# EAGLE board gatemodified (EAGLE 6.1)
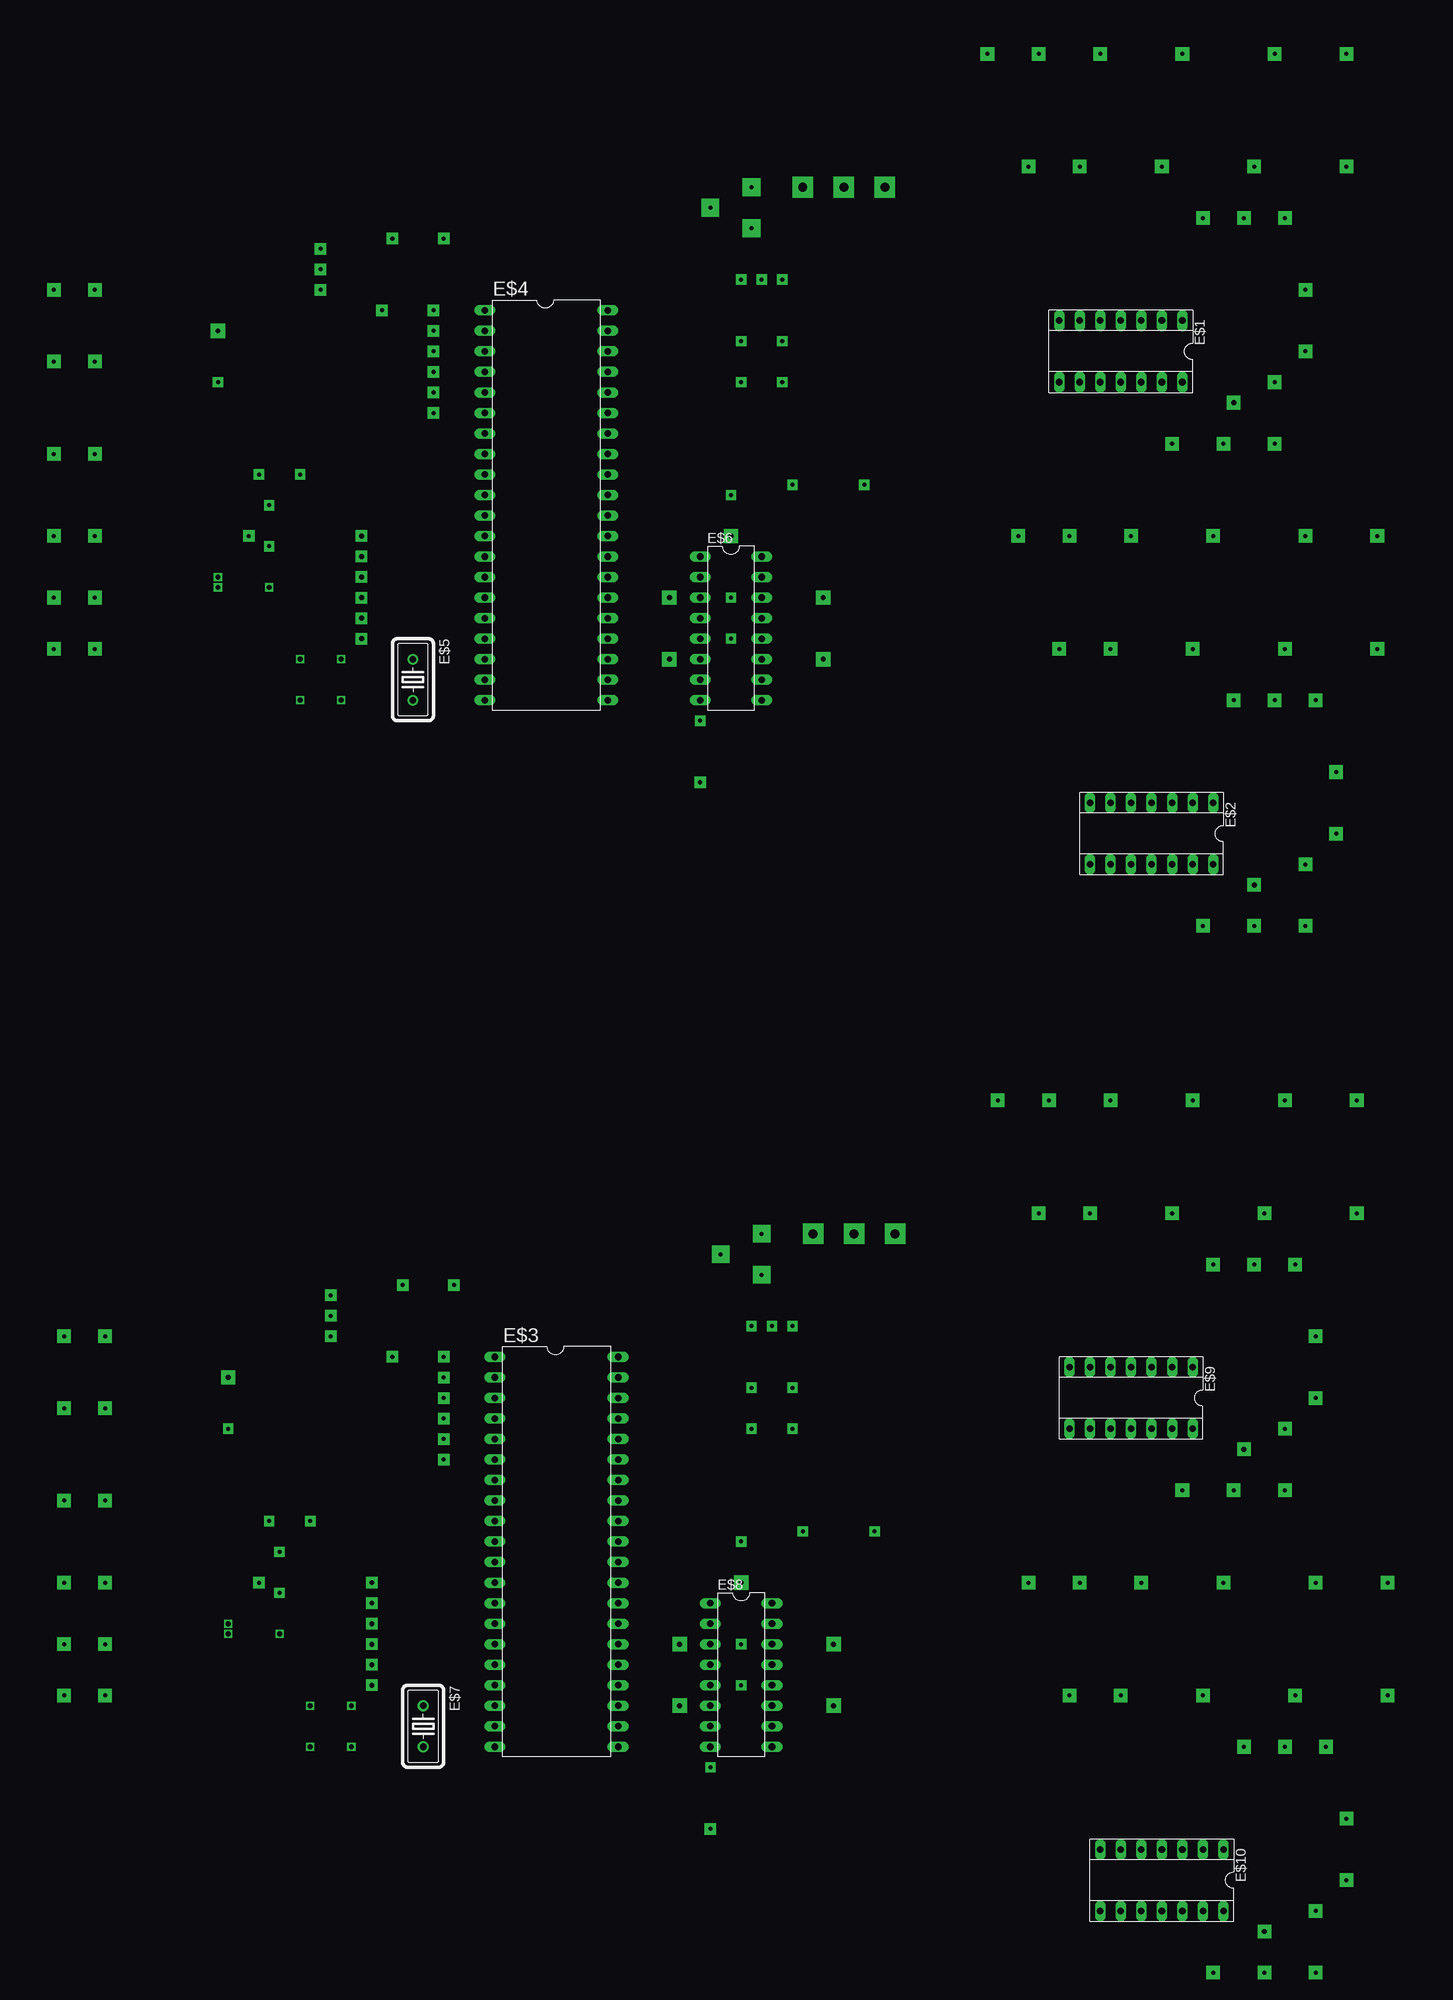
[diagram p0: board, top side]
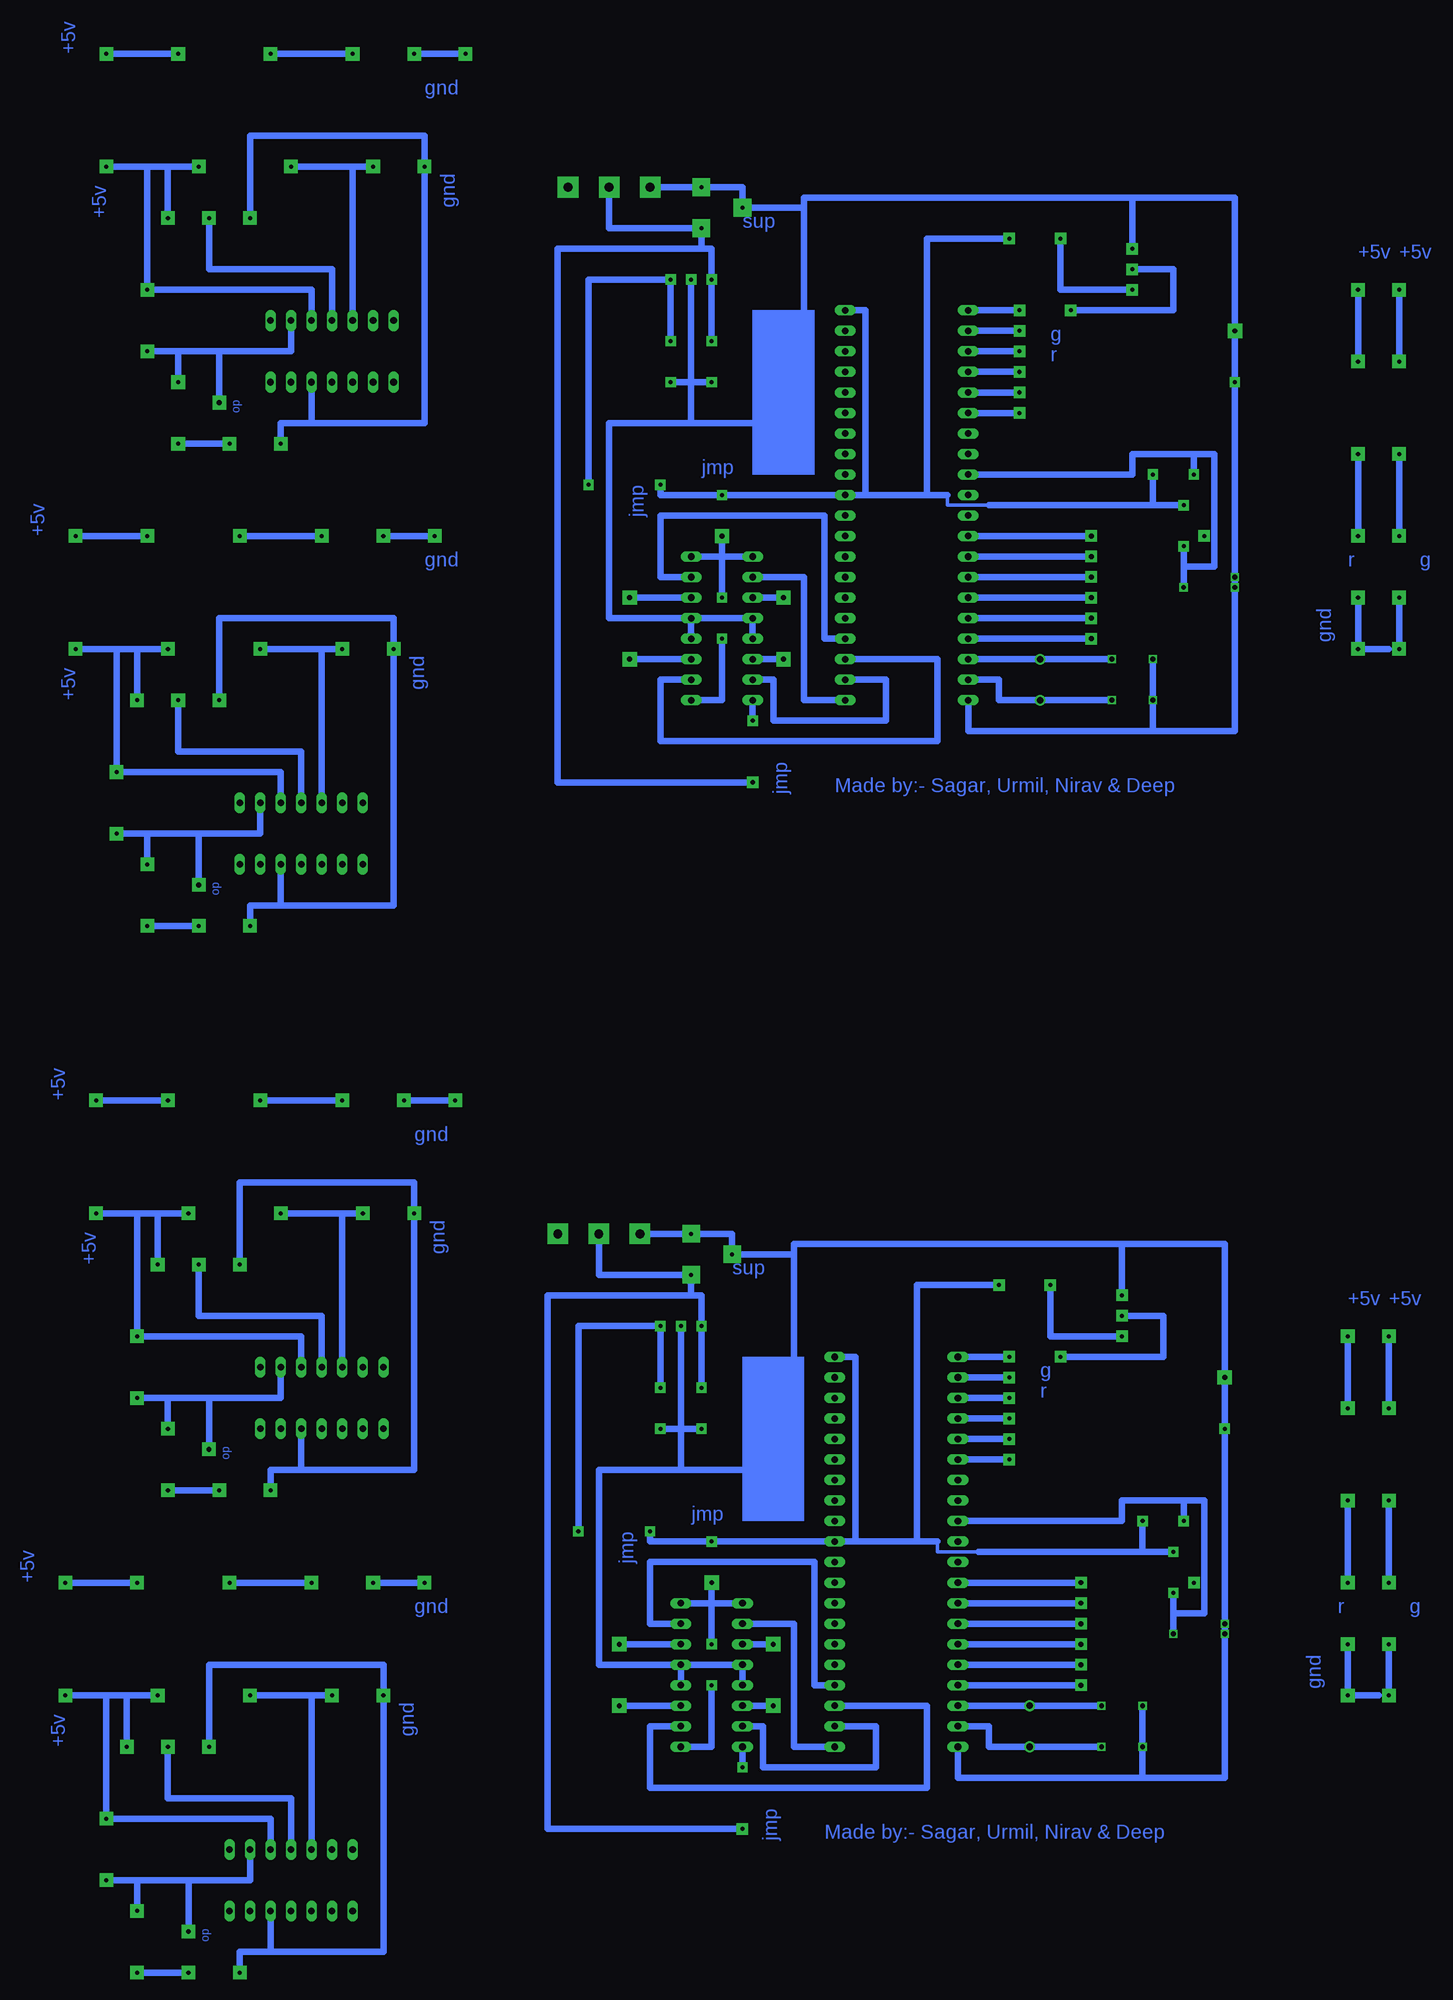
[diagram p1: board, bottom side, seen from below]

No outline drawn. Coordinates in mm, seen from the top.
Copper layers (1*16): Top 0.035mm / dielectric 1.5mm / Bottom 0.035mm
Design rules: minimum track width 10mil, minimum drill 24mil, track to track 8mil, track to pad 8mil, pad to pad 8mil, via to via 8mil, smd to smd 8mil, copper to edge 40mil, drill to drill 8mil, minimum pad ring 10mil, minimum via ring 8mil, stop-mask expansion 4mil, vias tented up to drill 0mil, thermal gap 10mil

## Footprints (pad centres in the part's own frame; a part is rotated, then mirrored left to right if it is on the bottom)
SOCKET-14 = drill 0.813 long: 1 -7.62,-3.81; 2 -5.08,-3.81; 3 -2.54,-3.81; 4 0,-3.81; 5 2.54,-3.81; 6 5.08,-3.81; 7 7.62,-3.81; 8 7.62,3.81; 9 5.08,3.81; 10 2.54,3.81; 11 0,3.81; 12 -2.54,3.81; 13 -5.08,3.81; 14 -7.62,3.81
DIL40 = drill 0.813 long: 1 -24.13,-7.62; 2 -21.59,-7.62; 3 -19.05,-7.62; 4 -16.51,-7.62; 5 -13.97,-7.62; 6 -11.43,-7.62; 7 -8.89,-7.62; 8 -6.35,-7.62; 9 -3.81,-7.62; 10 -1.27,-7.62; 11 1.27,-7.62; 12 3.81,-7.62; 13 6.35,-7.62; 14 8.89,-7.62; 15 11.43,-7.62; 16 13.97,-7.62; 17 16.51,-7.62; 18 19.05,-7.62; 19 21.59,-7.62; 20 24.13,-7.62; 21 24.13,7.62; 22 21.59,7.62; 23 19.05,7.62; 24 16.51,7.62; 25 13.97,7.62; 26 11.43,7.62; 27 8.89,7.62; 28 6.35,7.62; 29 3.81,7.62; 30 1.27,7.62; 31 -1.27,7.62; 32 -3.81,7.62; 33 -6.35,7.62; 34 -8.89,7.62; 35 -11.43,7.62; 36 -13.97,7.62; 37 -16.51,7.62; 38 -19.05,7.62; 39 -21.59,7.62; 40 -24.13,7.62
HC18U-V = drill 0.813: 1 -2.54,0; 2 2.54,0
DIL16 = drill 0.813 long: 1 -8.89,-3.81; 2 -6.35,-3.81; 3 -3.81,-3.81; 4 -1.27,-3.81; 5 1.27,-3.81; 6 3.81,-3.81; 7 6.35,-3.81; 8 8.89,-3.81; 9 8.89,3.81; 10 6.35,3.81; 11 3.81,3.81; 12 1.27,3.81; 13 -1.27,3.81; 14 -3.81,3.81; 15 -6.35,3.81; 16 -8.89,3.81

## Placement (x,y rotation side)
E$1  [SOCKET-14]  99.06,68.58 180 top
E$2  [SOCKET-14]  102.87,8.89 180 top
E$3  [DIL40]  29.21,-80.01 270 top
E$4  [DIL40]  27.94,49.53 270 top
E$5  [HC18U-V]  11.43,27.94 270 top
E$6  [DIL16]  50.8,34.29 270 top
E$7  [HC18U-V]  12.7,-101.6 270 top
E$8  [DIL16]  52.07,-95.25 270 top
E$9  [SOCKET-14]  100.33,-60.96 180 top
E$10  [SOCKET-14]  104.14,-120.65 180 top

## Library data of the parts
E$1 E$2 E$9 E$10 = ic-package
E$3 E$4 E$6 E$8 = 40xx
E$5 E$7 = crystal

## Nets
S$1: E$4.2
S$2: E$4.20
S$5: E$4.5
S$7: E$4.1
S$8: E$4.3
S$9: E$4.31 E$4.40
S$10: E$4.4
S$12: E$4.6
S$17: E$1.5
S$18: E$1.4
S$19: E$1.12
S$21: E$1.3
S$25: E$2.5
S$26: E$2.4
S$27: E$2.12
S$29: E$2.3
S$30: E$1.2
S$31: E$2.2
S$37: E$8.3
S$39: E$8.6
S$40: E$8.14
S$41: E$8.11
S$42: E$3.22 E$8.7
S$43: E$3.21 E$8.2
S$44: E$3.23 E$8.10
S$45: E$8.1 E$8.16
S$46: E$3.24 E$8.15
S$47: E$8.9
S$48: E$3.9
S$49: E$3.19 E$7.2
S$50: E$3.17
S$51: E$3.16
S$52: E$3.15
S$53: E$6.3
S$54: E$6.6
S$55: E$3.14
S$56: E$6.14
S$57: E$6.11
S$58: E$4.22 E$6.7
S$59: E$4.21 E$6.2
S$60: E$3.13
S$61: E$4.23 E$6.10
S$62: E$6.1 E$6.16
S$63: E$3.12
S$64: E$4.24 E$6.15
S$65: E$3.18 E$7.1
S$68: E$8.4 E$8.5 E$8.12 E$8.13
S$69: E$6.9
S$71: E$8.8
S$74: E$4.9
S$75: E$4.19 E$5.2
S$76: E$4.17
S$77: E$4.16
S$78: E$4.15
S$79: E$4.14
S$80: E$4.13
S$81: E$4.12
S$82: E$4.18 E$5.1
S$85: E$3.20
S$87: E$3.1
S$88: E$3.31 E$3.40
S$89: E$3.2
S$90: E$3.3
S$91: E$3.4
S$93: E$3.5
S$94: E$3.6
S$96: E$6.4 E$6.5 E$6.12 E$6.13
S$99: E$6.8
S$102: E$9.5
S$103: E$9.4
S$104: E$9.12
S$106: E$9.3
S$110: E$10.5
S$111: E$10.4
S$112: E$10.12
S$114: E$10.3
S$115: E$9.2
S$116: E$10.2

## Tracks (layer width: path | path; a pad name or v marks a point on that pad's centre or on a via)
S$1  (via drill 0.5 pad 1.42)
  Bottom 0.813: E$4.2 v13.97,71.12
S$2  (via drill 0.5 pad 1.27, 0.5 pad 1.42, 0.5 pad 2.18, 0.6, 0.6 pad 1.78, 1.1 pad 2.54)
  Bottom 0.813: 0,87.63 -12.7,87.63 v-12.7,71.12 v-12.7,64.77 v-12.7,39.37 -12.7,21.59 -2.54,21.59 | 0,87.63 40.64,87.63 40.64,86.36 | 40.64,86.36 40.64,71.12 44.45,71.12 44.45,59.69 | -2.54,21.59 20.32,21.59 E$4.20 | v-2.54,30.48 -2.54,21.59 | 40.64,86.36 v48.26,86.36 48.26,88.9 v53.34,88.9 v59.69,88.9 54.61,88.9 | v0,81.28 0,87.63
S$4  (via drill 0.5 pad 2.18, 1.1 pad 2.54)
  Bottom 0.813: 54.61,-48.26 v54.61,-45.72 66.04,-45.72 v66.04,-40.64
S$5  (via drill 0.5 pad 1.42)
  Bottom 0.813: E$4.5 v13.97,63.5
S$6  (via drill 0.5 pad 1.42)
  Bottom 0.813: v0,76.2 8.89,76.2 v8.89,82.55
S$7  (via drill 0.5 pad 1.42)
  Bottom 0.813: v13.97,73.66 E$4.1
S$8  (via drill 0.5 pad 1.42)
  Bottom 0.813: E$4.3 v13.97,68.58
S$9  (via drill 0.5 pad 1.27, 0.5 pad 1.42)
  Bottom 0.406: 22.86,50.8 22.86,49.53 17.78,49.53
  Bottom 0.813: E$4.40 33.02,73.66 33.02,50.8 | 33.02,50.8 E$4.31 v50.8,50.8 58.42,50.8 v58.42,52.07 | v-2.54,53.34 -2.54,49.53 | v-6.35,49.53 -2.54,49.53 | 33.02,50.8 25.4,50.8 | 25.4,50.8 22.86,50.8 | v15.24,82.55 25.4,82.55 25.4,50.8 | -2.54,49.53 17.78,49.53
S$10  (via drill 0.5 pad 1.42)
  Bottom 0.813: E$4.4 v13.97,66.04
S$11  (via drill 0.5 pad 1.42)
  Bottom 0.813: v7.62,73.66 -5.08,73.66 -5.08,78.74 v0,78.74
S$12  (via drill 0.5 pad 1.42)
  Bottom 0.813: E$4.6 v13.97,60.96
S$13  (via drill 0.5 pad 1.42)
  other vias: -8.89,45.72
S$14  (via drill 0.5 pad 1.68)
  Bottom 0.813: v127,105.41 v118.11,105.41
S$15  (via drill 0.5 pad 1.68)
  Bottom 0.813: v106.68,105.41 v96.52,105.41
S$16  (via drill 0.5 pad 1.68)
  Bottom 0.813: v88.9,105.41 v82.55,105.41
S$17  (via drill 0.5 pad 1.68)
  Bottom 0.813: v104.14,91.44 96.52,91.44 | 96.52,91.44 v93.98,91.44 | E$1.5 96.52,91.44
S$18  (via drill 0.5 pad 1.68)
  Bottom 0.813: v114.3,85.09 114.3,78.74 99.06,78.74 E$1.4
S$19  (via drill 0.5 pad 1.68)
  Bottom 0.813: E$1.12 101.6,59.69 | 101.6,59.69 87.63,59.69 v87.63,91.44 87.63,95.25 109.22,95.25 v109.22,85.09 | 101.6,59.69 105.41,59.69 v105.41,57.15
S$20  (via drill 0.5 pad 1.68)
  Bottom 0.813: v118.11,57.15 v111.76,57.15
S$21  (via drill 0.5 pad 1.68)
  Bottom 0.813: v127,91.44 121.92,91.44 | 121.92,91.44 119.38,91.44 | v119.38,85.09 119.38,91.44 | 119.38,91.44 v115.57,91.44 | E$1.3 101.6,76.2 v121.92,76.2 121.92,91.44
S$22  (via drill 0.5 pad 1.68)
  Bottom 0.813: v130.81,45.72 v121.92,45.72
S$23  (via drill 0.5 pad 1.68)
  Bottom 0.813: v110.49,45.72 v100.33,45.72
S$24  (via drill 0.5 pad 1.68)
  Bottom 0.813: v92.71,45.72 v86.36,45.72
S$25  (via drill 0.5 pad 1.68)
  Bottom 0.813: v107.95,31.75 100.33,31.75 | 100.33,31.75 v97.79,31.75 | E$2.5 100.33,31.75
S$26  (via drill 0.5 pad 1.68)
  Bottom 0.813: v118.11,25.4 118.11,19.05 102.87,19.05 E$2.4
S$27  (via drill 0.5 pad 1.68)
  Bottom 0.813: E$2.12 105.41,0 | 105.41,0 91.44,0 v91.44,31.75 91.44,35.56 113.03,35.56 v113.03,25.4 | 105.41,0 109.22,0 v109.22,-2.54
S$28  (via drill 0.5 pad 1.68)
  Bottom 0.813: v121.92,-2.54 v115.57,-2.54
S$29  (via drill 0.5 pad 1.68)
  Bottom 0.813: v130.81,31.75 125.73,31.75 | 125.73,31.75 123.19,31.75 | v123.19,25.4 123.19,31.75 | 123.19,31.75 v119.38,31.75 | E$2.3 105.41,16.51 v125.73,16.51 125.73,31.75
S$30  (via drill 0.5 pad 1.68, 0.6 pad 1.68)
  Bottom 0.813: E$1.2 104.14,68.58 113.03,68.58 | 113.03,68.58 118.11,68.58 | 118.11,68.58 v118.11,64.77 | 118.11,68.58 v121.92,68.58 | v113.03,62.23 113.03,68.58
S$31  (via drill 0.5 pad 1.68, 0.6 pad 1.68)
  Bottom 0.813: E$2.2 107.95,8.89 115.57,8.89 | 115.57,8.89 121.92,8.89 | 121.92,8.89 v121.92,5.08 | 121.92,8.89 v125.73,8.89 | v115.57,2.54 115.57,8.89
S$32  (via drill 0.5 pad 1.68)
  Bottom 0.813: v-33.02,76.2 v-33.02,67.31
S$33  (via drill 0.5 pad 1.68)
  Bottom 0.813: v-27.94,55.88 v-27.94,45.72
S$34  (via drill 0.5 pad 1.68)
  Bottom 0.813: v-33.02,38.1 v-33.02,31.75
S$35  (via drill 0.5 pad 1.68)
  Bottom 0.813: v-27.94,76.2 v-27.94,67.31
S$36  (via drill 0.5 pad 1.68)
  Bottom 0.813: v-33.02,55.88 v-33.02,45.72
S$37  (via drill 0.6 pad 1.78)
  Bottom 0.813: E$8.3 v44.45,-91.44
S$38  (via drill 0.5 pad 1.68)
  Bottom 0.813: -31.75,31.75 v-27.94,31.75 v-27.94,38.1
S$39  (via drill 0.6 pad 1.78)
  Bottom 0.813: E$8.6 v44.45,-99.06
S$40  (via drill 0.6 pad 1.78)
  Bottom 0.813: E$8.14 v63.5,-91.44
S$41  (via drill 0.6 pad 1.78)
  Bottom 0.813: E$8.11 v63.5,-99.06
S$42
  Bottom 0.813: E$8.7 45.72,-101.6 45.72,-106.68 31.75,-106.68 31.75,-101.6 E$3.22
S$43
  Bottom 0.813: E$8.2 41.91,-88.9 41.91,-104.14 E$3.21
S$44
  Bottom 0.813: E$3.23 25.4,-99.06 25.4,-109.22 59.69,-109.22 59.69,-101.6 E$8.10
S$45  (via drill 0.5 pad 1.27, 0.6 pad 1.78)
  Bottom 0.813: E$8.1 52.07,-86.36 | 52.07,-86.36 E$8.16 | 52.07,-86.36 v52.07,-83.82 | v52.07,-91.44 52.07,-86.36
S$46
  Bottom 0.813: E$3.24 39.37,-96.52 39.37,-81.28 59.69,-81.28 59.69,-88.9 E$8.15
S$47  (via drill 0.5 pad 0.81, 0.5 pad 1.27)
  Bottom 0.813: E$8.9 52.07,-104.14 v52.07,-96.52
S$48  (via drill 0.5 pad 1.27, 0.6)
  Bottom 0.813: v-5.08,-85.09 -5.08,-87.63 | v-6.35,-76.2 -6.35,-73.66 | -6.35,-73.66 1.27,-73.66 1.27,-76.2 E$3.9 | -6.35,-73.66 -8.89,-73.66 -8.89,-87.63 -5.08,-87.63 | -5.08,-87.63 v-5.08,-90.17
S$49  (via drill 0.6)
  Bottom 0.813: E$3.19 17.78,-101.6 17.78,-104.14 E$7.2 v3.81,-104.14
S$50  (via drill 0.5 pad 1.42, 0.6)
  Bottom 0.813: E$3.17 v6.35,-96.52
S$51  (via drill 0.5 pad 1.42, 0.6)
  Bottom 0.813: E$3.16 v6.35,-93.98
S$52  (via drill 0.5 pad 1.42, 0.6)
  Bottom 0.813: E$3.15 v6.35,-91.44
S$53  (via drill 0.6 pad 1.78)
  Bottom 0.813: E$6.3 v43.18,38.1
S$54  (via drill 0.6 pad 1.78)
  Bottom 0.813: E$6.6 v43.18,30.48
S$55  (via drill 0.5 pad 1.42, 0.6)
  Bottom 0.813: E$3.14 v6.35,-88.9
S$56  (via drill 0.6 pad 1.78)
  Bottom 0.813: E$6.14 v62.23,38.1
S$57  (via drill 0.6 pad 1.78)
  Bottom 0.813: E$6.11 v62.23,30.48
S$58
  Bottom 0.813: E$6.7 44.45,27.94 44.45,22.86 30.48,22.86 30.48,27.94 E$4.22
S$59
  Bottom 0.813: E$6.2 40.64,40.64 40.64,25.4 E$4.21
S$60  (via drill 0.5 pad 1.42, 0.6)
  Bottom 0.813: E$3.13 v6.35,-86.36
S$61
  Bottom 0.813: E$4.23 24.13,30.48 24.13,20.32 58.42,20.32 58.42,27.94 E$6.10
S$62  (via drill 0.5 pad 1.27, 0.6 pad 1.78)
  Bottom 0.813: E$6.1 50.8,43.18 | 50.8,43.18 E$6.16 | 50.8,43.18 v50.8,45.72 | v50.8,38.1 50.8,43.18
S$63  (via drill 0.5 pad 1.42, 0.6)
  Bottom 0.813: E$3.12 v6.35,-83.82
S$64
  Bottom 0.813: E$4.24 38.1,33.02 38.1,48.26 58.42,48.26 58.42,40.64 E$6.15
S$65  (via drill 0.6)
  Bottom 0.813: E$3.18 E$7.1 v3.81,-99.06
S$66  (via drill 0.6)
  other vias: -11.43,-88.9
S$67  (via drill 0.6)
  other vias: -1.27,-104.14
S$68  (via drill 0.5 pad 1.27)
  Bottom 0.813: E$8.13 E$8.12 | E$8.13 E$8.4 E$8.5 | v55.88,-52.07 55.88,-64.77 | v58.42,-64.77 55.88,-64.77 | 55.88,-64.77 v53.34,-64.77 | 55.88,-69.85 66.04,-69.85 66.04,-93.98 E$8.13 | 55.88,-69.85 46.99,-69.85 | 55.88,-64.77 55.88,-69.85
S$69  (via drill 0.5 pad 0.81, 0.5 pad 1.27)
  Bottom 0.813: E$6.9 50.8,25.4 v50.8,33.02
S$70  (via drill 0.5 pad 1.27)
  Bottom 0.813: v58.42,-59.69 v58.42,-52.07 68.58,-52.07 v68.58,-77.47
S$71  (via drill 0.5 pad 1.27)
  Bottom 0.813: E$8.8 v48.26,-106.68
S$73  (via drill 0.5 pad 1.27, 0.5 pad 1.42)
  Bottom 0.813: v48.26,-114.3 72.39,-114.3 72.39,-48.26 53.34,-48.26 v53.34,-52.07 v53.34,-59.69
S$74  (via drill 0.5 pad 1.27, 0.6)
  Bottom 0.813: v-6.35,44.45 -6.35,41.91 | v-7.62,53.34 -7.62,55.88 | -7.62,55.88 0,55.88 0,53.34 E$4.9 | -7.62,55.88 -10.16,55.88 -10.16,41.91 -6.35,41.91 | -6.35,41.91 v-6.35,39.37
S$75  (via drill 0.6)
  Bottom 0.813: E$4.19 16.51,27.94 16.51,25.4 E$5.2 v2.54,25.4
S$76  (via drill 0.5 pad 1.42, 0.6)
  Bottom 0.813: E$4.17 v5.08,33.02
S$77  (via drill 0.5 pad 1.42, 0.6)
  Bottom 0.813: E$4.16 v5.08,35.56
S$78  (via drill 0.5 pad 1.42, 0.6)
  Bottom 0.813: E$4.15 v5.08,38.1
S$79  (via drill 0.5 pad 1.42, 0.6)
  Bottom 0.813: E$4.14 v5.08,40.64
S$80  (via drill 0.5 pad 1.42, 0.6)
  Bottom 0.813: E$4.13 v5.08,43.18
S$81  (via drill 0.5 pad 1.42, 0.6)
  Bottom 0.813: E$4.12 v5.08,45.72
S$82  (via drill 0.6)
  Bottom 0.813: E$4.18 E$5.1 v2.54,30.48
S$83  (via drill 0.6)
  other vias: -12.7,40.64
S$84  (via drill 0.6)
  other vias: -2.54,25.4
S$85  (via drill 0.5 pad 1.27, 0.5 pad 1.42, 0.5 pad 2.18, 0.6, 0.6 pad 1.78, 1.1 pad 2.54)
  Bottom 0.813: 1.27,-41.91 -11.43,-41.91 v-11.43,-58.42 v-11.43,-64.77 v-11.43,-90.17 -11.43,-107.95 -1.27,-107.95 | 1.27,-41.91 41.91,-41.91 41.91,-43.18 | 41.91,-43.18 41.91,-58.42 45.72,-58.42 45.72,-69.85 | -1.27,-107.95 21.59,-107.95 E$3.20 | v-1.27,-99.06 -1.27,-107.95 | 41.91,-43.18 v49.53,-43.18 49.53,-40.64 v54.61,-40.64 v60.96,-40.64 55.88,-40.64 | v1.27,-48.26 1.27,-41.91
S$86  (via drill 0.5 pad 1.42)
  Bottom 0.813: v1.27,-53.34 10.16,-53.34 v10.16,-46.99
S$87  (via drill 0.5 pad 1.42)
  Bottom 0.813: v15.24,-55.88 E$3.1
S$88  (via drill 0.5 pad 1.27, 0.5 pad 1.42)
  Bottom 0.406: 24.13,-78.74 24.13,-80.01 19.05,-80.01
  Bottom 0.813: E$3.40 34.29,-55.88 34.29,-78.74 | 34.29,-78.74 E$3.31 v52.07,-78.74 59.69,-78.74 v59.69,-77.47 | v-1.27,-76.2 -1.27,-80.01 | v-5.08,-80.01 -1.27,-80.01 | 34.29,-78.74 26.67,-78.74 | 26.67,-78.74 24.13,-78.74 | v16.51,-46.99 26.67,-46.99 26.67,-78.74 | -1.27,-80.01 19.05,-80.01
S$89  (via drill 0.5 pad 1.42)
  Bottom 0.813: E$3.2 v15.24,-58.42
S$90  (via drill 0.5 pad 1.42)
  Bottom 0.813: E$3.3 v15.24,-60.96
S$91  (via drill 0.5 pad 1.42)
  Bottom 0.813: E$3.4 v15.24,-63.5
S$92  (via drill 0.5 pad 1.42)
  Bottom 0.813: v8.89,-55.88 -3.81,-55.88 -3.81,-50.8 v1.27,-50.8
S$93  (via drill 0.5 pad 1.42)
  Bottom 0.813: E$3.5 v15.24,-66.04
S$94  (via drill 0.5 pad 1.42)
  Bottom 0.813: E$3.6 v15.24,-68.58
S$95  (via drill 0.5 pad 1.42)
  other vias: -7.62,-83.82
S$96  (via drill 0.5 pad 1.27)
  Bottom 0.813: E$6.13 E$6.12 | E$6.13 E$6.4 E$6.5 | v54.61,77.47 54.61,64.77 | v57.15,64.77 54.61,64.77 | 54.61,64.77 v52.07,64.77 | 54.61,59.69 64.77,59.69 64.77,35.56 E$6.13 | 54.61,59.69 45.72,59.69 | 54.61,64.77 54.61,59.69
S$97  (via drill 0.5 pad 1.27)
  Bottom 0.813: v57.15,69.85 v57.15,77.47 67.31,77.47 v67.31,52.07
S$98  (via drill 0.5 pad 1.68)
  Bottom 0.813: v128.27,-24.13 v119.38,-24.13
S$99  (via drill 0.5 pad 1.27)
  Bottom 0.813: E$6.8 v46.99,22.86
S$100  (via drill 0.5 pad 1.68)
  Bottom 0.813: v107.95,-24.13 v97.79,-24.13
S$101  (via drill 0.5 pad 1.68)
  Bottom 0.813: v90.17,-24.13 v83.82,-24.13
S$102  (via drill 0.5 pad 1.68)
  Bottom 0.813: v105.41,-38.1 97.79,-38.1 | 97.79,-38.1 v95.25,-38.1 | E$9.5 97.79,-38.1
S$103  (via drill 0.5 pad 1.68)
  Bottom 0.813: v115.57,-44.45 115.57,-50.8 100.33,-50.8 E$9.4
S$104  (via drill 0.5 pad 1.68)
  Bottom 0.813: E$9.12 102.87,-69.85 | 102.87,-69.85 88.9,-69.85 v88.9,-38.1 88.9,-34.29 110.49,-34.29 v110.49,-44.45 | 102.87,-69.85 106.68,-69.85 v106.68,-72.39
S$105  (via drill 0.5 pad 1.68)
  Bottom 0.813: v119.38,-72.39 v113.03,-72.39
S$106  (via drill 0.5 pad 1.68)
  Bottom 0.813: v128.27,-38.1 123.19,-38.1 | 123.19,-38.1 120.65,-38.1 | v120.65,-44.45 120.65,-38.1 | 120.65,-38.1 v116.84,-38.1 | E$9.3 102.87,-53.34 v123.19,-53.34 123.19,-38.1
S$107  (via drill 0.5 pad 1.68)
  Bottom 0.813: v132.08,-83.82 v123.19,-83.82
S$108  (via drill 0.5 pad 1.68)
  Bottom 0.813: v111.76,-83.82 v101.6,-83.82
S$109  (via drill 0.5 pad 1.68)
  Bottom 0.813: v93.98,-83.82 v87.63,-83.82
S$110  (via drill 0.5 pad 1.68)
  Bottom 0.813: v109.22,-97.79 101.6,-97.79 | 101.6,-97.79 v99.06,-97.79 | E$10.5 101.6,-97.79
S$111  (via drill 0.5 pad 1.68)
  Bottom 0.813: v119.38,-104.14 119.38,-110.49 104.14,-110.49 E$10.4
S$112  (via drill 0.5 pad 1.68)
  Bottom 0.813: E$10.12 106.68,-129.54 | 106.68,-129.54 92.71,-129.54 v92.71,-97.79 92.71,-93.98 114.3,-93.98 v114.3,-104.14 | 106.68,-129.54 110.49,-129.54 v110.49,-132.08
S$113  (via drill 0.5 pad 1.68)
  Bottom 0.813: v123.19,-132.08 v116.84,-132.08
S$114  (via drill 0.5 pad 1.68)
  Bottom 0.813: v132.08,-97.79 127,-97.79 | 127,-97.79 124.46,-97.79 | v124.46,-104.14 124.46,-97.79 | 124.46,-97.79 v120.65,-97.79 | E$10.3 106.68,-113.03 v127,-113.03 127,-97.79
S$115  (via drill 0.5 pad 1.68, 0.6 pad 1.68)
  Bottom 0.813: E$9.2 105.41,-60.96 114.3,-60.96 | 114.3,-60.96 119.38,-60.96 | 119.38,-60.96 v119.38,-64.77 | 119.38,-60.96 v123.19,-60.96 | v114.3,-67.31 114.3,-60.96
S$116  (via drill 0.5 pad 1.68, 0.6 pad 1.68)
  Bottom 0.813: E$10.2 109.22,-120.65 116.84,-120.65 | 116.84,-120.65 123.19,-120.65 | 123.19,-120.65 v123.19,-124.46 | 123.19,-120.65 v127,-120.65 | v116.84,-127 116.84,-120.65
S$117  (via drill 0.5 pad 1.68)
  Bottom 0.813: v-26.67,-73.66 v-26.67,-83.82
S$118  (via drill 0.5 pad 1.68)
  Bottom 0.813: v-31.75,-53.34 v-31.75,-62.23
S$119  (via drill 0.5 pad 1.68)
  Bottom 0.813: v-26.67,-53.34 v-26.67,-62.23
S$120  (via drill 0.5 pad 1.68)
  Bottom 0.813: v-31.75,-73.66 v-31.75,-83.82
S$121  (via drill 0.5 pad 1.68)
  Bottom 0.813: v-31.75,-91.44 v-31.75,-97.79
S$122  (via drill 0.5 pad 1.68)
  Bottom 0.813: -30.48,-97.79 v-26.67,-97.79 v-26.67,-91.44
S$123  (via drill 1.1 pad 2.54)
  other vias: 71.12,-40.64
S$125  (via drill 1.1 pad 2.54)
  other vias: 69.85,88.9
S$126  (via drill 0.5 pad 1.27, 0.5 pad 1.42, 0.5 pad 2.18, 1.1 pad 2.54)
  Bottom 0.813: v46.99,15.24 71.12,15.24 71.12,81.28 53.34,81.28 | v52.07,69.85 v52.07,77.47 52.07,81.28 53.34,81.28 | 53.34,81.28 v53.34,83.82 64.77,83.82 v64.77,88.9
(copper drawn outside any net)
  shapes: Bottom area x2

## Text on the board
Bottom: +5v | gnd | gnd | +5v | sup | +5v | +5v | g | r | op | jmp | jmp | +5v | g | r | gnd | gnd | gnd | +5v | jmp | Made by:- Sagar, Urmil, Nirav & Deep | op | +5v | gnd | gnd | +5v | sup | +5v | +5v | g | r | op | jmp | jmp | +5v | g | r | gnd | gnd | gnd | +5v | jmp | Made by:- Sagar, Urmil, Nirav & Deep | op